# EAGLE board RX-FM-One-Transistor-Super-Regen-Dip1 (EAGLE 7.2.0)
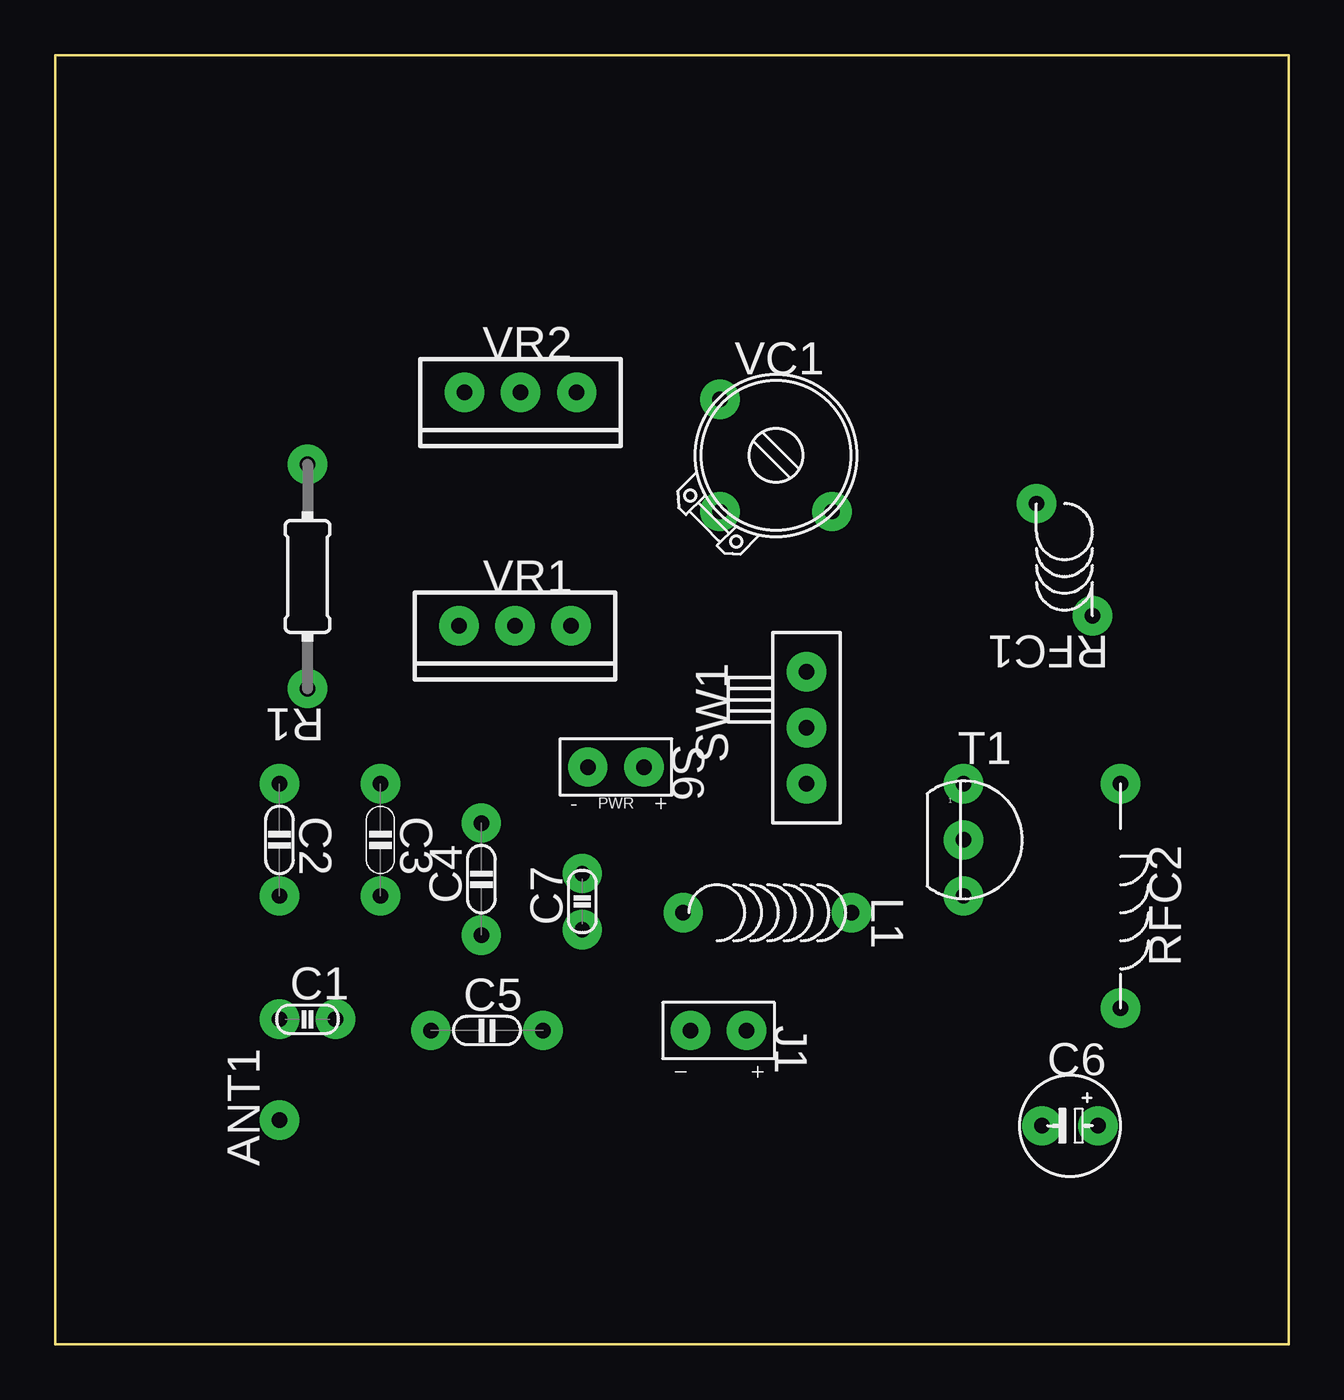
[diagram p0: board, top side]
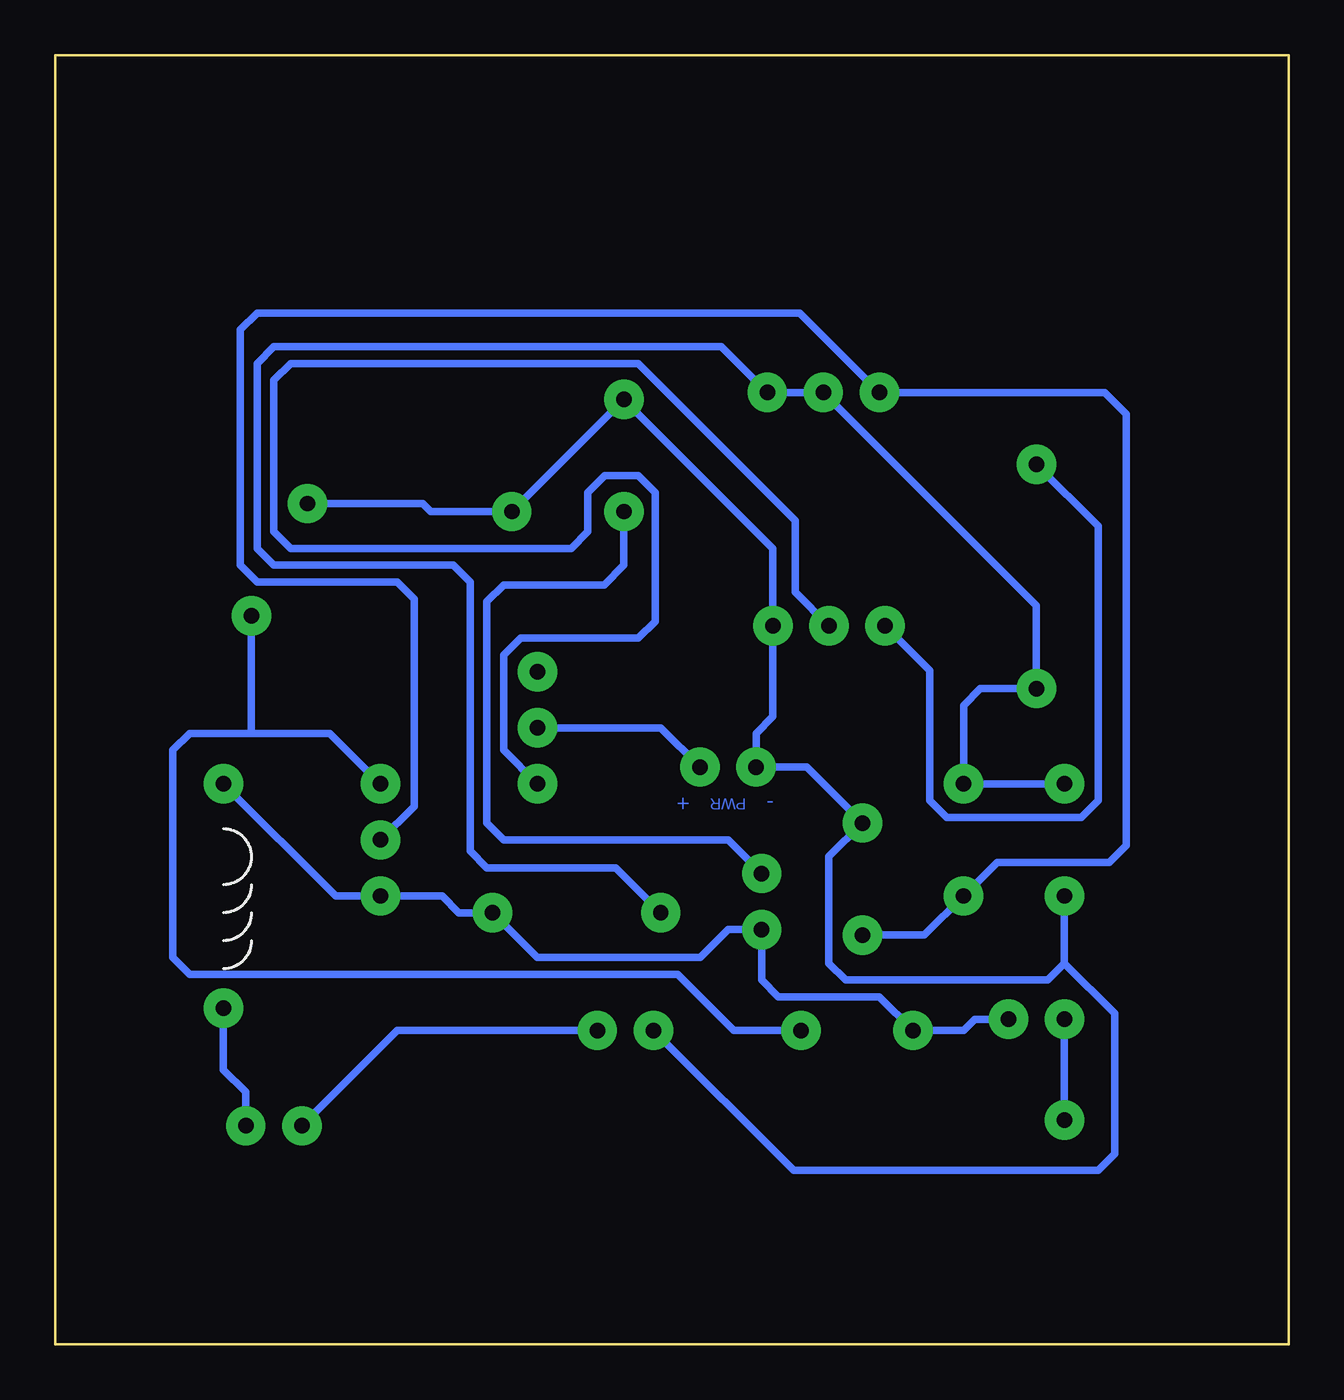
[diagram p1: board, bottom side, seen from below]

Size 55.88 x 58.42 mm. Coordinates in mm from the lower left corner, seen from the top.
Outline: 0,55.88 0,0 55.88,0 55.88,58.42 0,58.42 0,55.88
Copper layers (1*16): Top 0.035mm / dielectric 1.5mm / Bottom 0.035mm
Design rules "default *": minimum track width 10mil, minimum drill 0.61mm, track to track 8mil, track to pad 8mil, pad to pad 8mil, via to via 8mil, smd to smd 8mil, copper to edge 40mil, drill to drill 8mil, minimum pad ring 0mil, minimum via ring 8mil, stop-mask expansion 2mil, vias tented up to drill 15mil, thermal gap 10mil
Net classes: 0 default: width 0.33 mm, clearance 0.33 mm

## Footprints (pad centres in the part's own frame; a part is rotated, then mirrored left to right if it is on the bottom)
SPAD = drill 0.7 pad 1.778: 1 0,0
C025-015X024 = drill 0.7 pad 1.778: 1 -1.27,0; 2 1.27,0
C050-020X036/V = drill 0.7 pad 1.778: 1 0,-2.54; 2 0,2.54
C050-020X036 = drill 0.7 pad 1.778: 1 -2.54,0; 2 2.54,0
E2,5-4 = drill 0.7 pad 1.778: + 1.27,0; - -1.27,0
SPAD+- = drill 0.7 pad 1.778: 1 0,-1.27; 2 0,1.27
L-04/7-V = drill 0.7 pad 1.778: 1 0,3.81; 2 0,-3.81
0204/10-V = drill 0.7 pad 1.778: 1 0,5.08; 2 0,-5.08
L-04-2/5V = drill 0.7 pad 1.778: 1 1.27,-2.54; 2 -1.27,2.54
L-03/10 = drill 0.7 pad 1.778: 1 5.08,0; 2 -5.08,0
PWR-R = drill 0.7 pad 1.778: 1 0,-1.27; 2 0,1.27
SLSW-1P2T-H = drill 0.7 pad 1.778: O 2.54,0; P 0,0; S -2.54,0
TO92 = drill 0.7 pad 1.778: 1 0,2.54; 2 0,0; 3 0,-2.54
TRIM-2222-808 = drill 0.7 pad 1.778: 1 -2.54,2.54; 2 -2.54,-2.54; 3 2.54,-2.54
TRIM-POT = drill 0.7 pad 1.778: A -2.54,0; E 2.54,0; S 0,0

## Placement (x,y rotation side)
ANT1  ANT  [SPAD]  10.16,10.16 90 top
C1  5pF  [C025-015X024]  11.43,14.73 0 top
C2  0.001  [C050-020X036/V]  10.16,22.86 180 top
C3  0.001  [C050-020X036]  14.73,22.86 270 top
C4  100pF  [C050-020X036/V]  19.3,21.08 0 top
C5  10pF  [C050-020X036/V]  19.56,14.22 270 top
C6  10µF  [E2,5-4]  45.97,9.91 0 top
C7  47pF  [C025-015X024]  23.88,20.07 90 top
J1  SPAD+-+-  [SPAD+-]  30.05,14.22 270 top
L1  4t  [L-04/7-V]  32.26,19.56 270 top
R1  2.2kΩ  [0204/10-V]  11.43,34.8 180 top
RFC1  10µH  [L-04-2/5V]  45.72,35.56 180 top
RFC2  10µH  [L-03/10]  48.26,20.32 270 top
S6  VCC_GNDPWR-R  [PWR-R]  25.4,26.16 270 top
SW1  SW-SPST-SL-1P2T-H  [SLSW-1P2T-H]  34.04,27.94 90 top
T1  2N3904  [TO92]  41.15,22.86 0 top
VC1  20pF  [TRIM-2222-808]  32.65,40.28 0 top
VR1  10kΩ  [TRIM-POT]  20.83,32.56 0 top
VR2  100kΩ  [TRIM-POT]  21.08,43.13 0 top

## Library data of the parts
ANT1 C1-C7 J1 L1 R1 RFC1 RFC2 S6 SW1 T1 VC1 VR1 VR2 = common

## Nets
GND: C2.2 C4.2 J1.1 RFC1.1 S6.1 VC1.1 VC1.3 VR1.E
N$1: ANT1.1 C1.1
N$2: C1.2 C5.1 C7.1 L1.1 RFC2.2 T1.3
N$3: C2.1 C3.1 L1.2 R1.1 VR2.E VR2.S
N$4: C7.2 VC1.2
N$5: R1.2 VR1.A
N$6: C5.2 RFC1.2 T1.1
N$7: C3.2 C4.1 T1.2 VR2.A
N$8: SW1.S VR1.S
N$9: C6.+ RFC2.1
N$10: C6.- J1.2
VCC: S6.2 SW1.P

## Tracks (layer width: path | path; a pad name or v marks a point on that pad's centre or on a via)
GND
  Bottom 0.33: RFC1.1 39.22,38.1 38.86,37.74 VC1.3 VC1.1 23.37,36.07 VR1.E 23.37,28.45 24.13,27.69 S6.1 21.84,26.16 C4.2 20.83,22.1 20.83,17.27 20.07,16.51 10.92,16.51 10.16,17.27 | 10.16,17.27 7.87,14.99 7.87,8.64 8.64,7.87 22.43,7.87 J1.1 | 10.16,17.27 C2.2
N$1
  Bottom 0.33: ANT1.1 C1.1
N$2
  Bottom 0.33: C1.2 14.22,14.73 14.73,14.22 C5.1 18.54,15.75 23.11,15.75 23.88,16.51 C7.1 25.4,18.8 26.67,17.53 34.04,17.53 L1.1 37.59,19.56 38.35,20.32 T1.3 43.18,20.32 RFC2.2
N$3
  Bottom 0.33: C2.1 C3.1 14.73,28.96 13.97,29.72 R1.1 11.43,33.48 VR2.S VR2.E 25.7,45.21 45.97,45.21 46.74,44.45 46.74,36.07 45.97,35.31 37.85,35.31 37.08,34.54 37.08,22.35 36.32,21.59 30.48,21.59 L1.2
N$4
  Bottom 0.33: VC1.2 30.11,35.31 31,34.42 35.56,34.42 36.32,33.66 36.32,23.62 35.56,22.86 25.4,22.86 C7.2
N$5
  Bottom 0.33: VR1.A 16.26,30.52 16.26,24.64 15.49,23.88 9.4,23.88 8.64,24.64 8.64,37.08 R1.2
N$6
  Bottom 0.33: T1.1 43.43,27.69 46.99,27.69 | 46.99,27.69 49.78,27.69 50.55,26.92 50.55,17.53 49.78,16.76 27.69,16.76 25.15,14.22 C5.2 | 46.99,27.69 RFC1.2
N$7
  Bottom 0.33: C4.1 16.51,18.54 C3.2 13.21,21.84 8.13,21.84 7.37,22.61 7.37,42.16 8.34,43.13 VR2.A 22.14,46.74 46.74,46.74 47.5,45.97 47.5,35.31 46.74,34.54 40.39,34.54 39.62,33.78 39.62,24.38 T1.2
N$8
  Bottom 0.33: SW1.S 35.56,26.92 35.56,31.24 34.8,32 29.46,32 28.7,32.77 28.7,38.61 29.46,39.37 30.99,39.37 31.75,38.61 31.75,36.83 32.51,36.07 45.21,36.07 45.97,36.83 45.97,43.69 45.21,44.45 29.46,44.45 22.35,37.34 22.35,34.08 VR1.S
N$9
  Bottom 0.33: C6.+ 47.24,11.43 48.26,12.45 RFC2.1
N$10
  Bottom 0.33: C6.- 40.39,14.22 J1.2
VCC
  Bottom 0.33: SW1.P 28.45,27.94 S6.2

## Text on the board
tPlace: VR2 | VC1 | VR1 | RFC1 | R1 | S6 | SW1 | T1 | C2 | C3 | RFC2 | C4 | L1 | C7 | C1 | C5 | J1 | C6 | ANT1